# Altium PCB tr-804-DECT_2023-07.PcbDoc (part 2 of 3)
Units mm, origin at the board's own origin, x right, y up, seen from the top; angles counter-clockwise.
Board outline 65 x 137.8 mm, 4 copper layers (Top Layer, Top, Internal Plane 1, PWR, Internal Plane 2, GND, Bottom Layer, Bottom); 160 components, 162 nets, 856 pads, 321 vias.
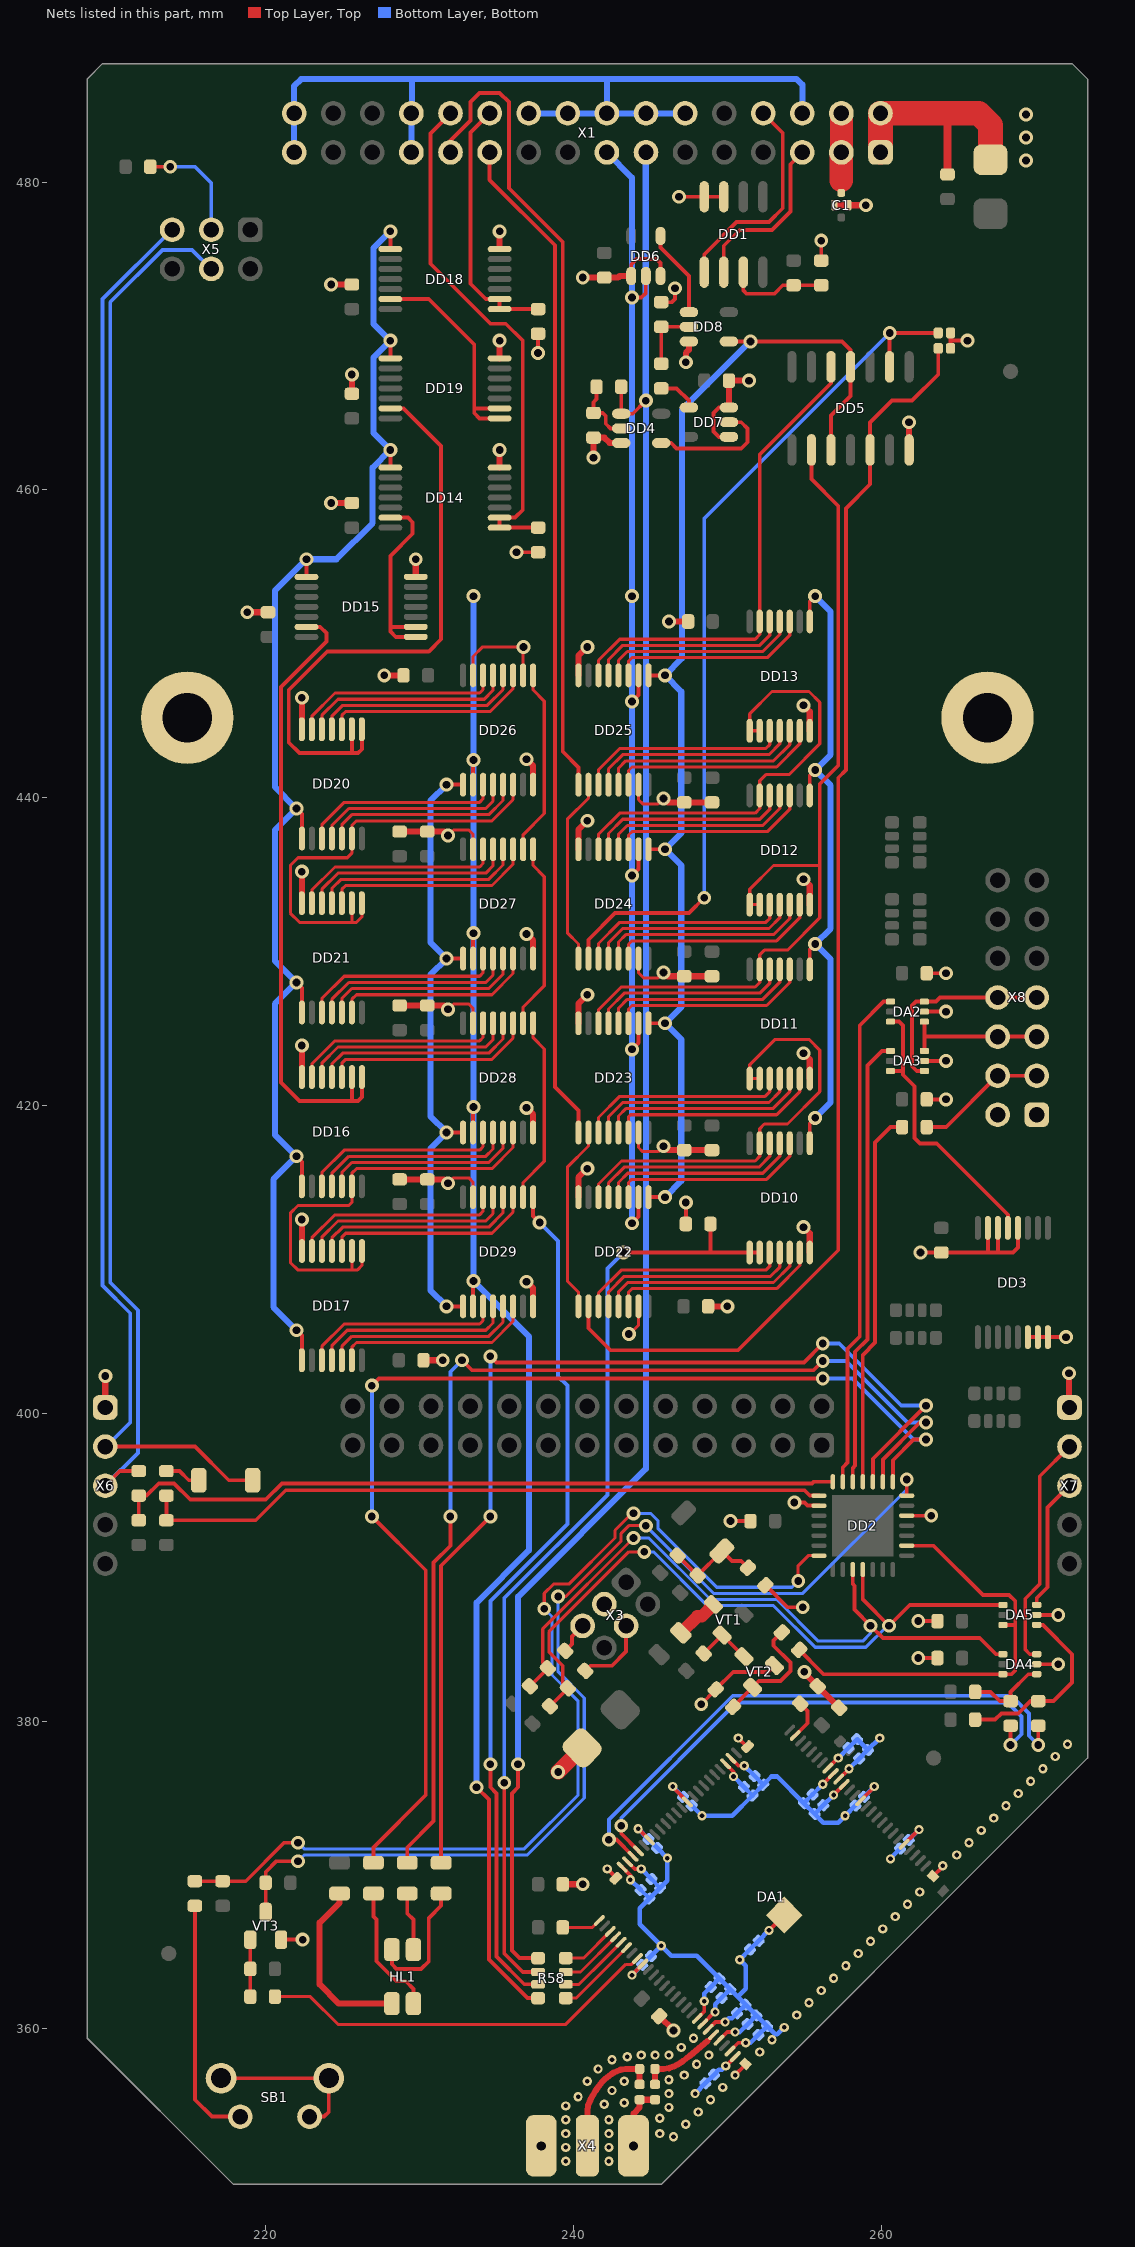
[diagram p4: the nets of this part, all layers, seen from the top]

## Via types
v1: diameter 0.9, hole 0.5, Top Layer, Top to Bottom Layer, Bottom, 229 vias
v2: diameter 0.6, hole 0.3, Top Layer, Top to Bottom Layer, Bottom, 92 vias

## Nets (pads, with @x,y where several pads share a name; then routed paths per layer and width w, separated by ;. In a path a pad name is that pad's centre, name@x,y a point inside that pad or via, vN(x,y) a via of type N, cw(c..) or ccw(c..) an arc to the next point about the centre after c; other vN are vias at no path point) (continued)
GND: C1.2 C1.4 C4.2 C5.2 C7.2 C10.2 C11.2 C12.2 C13.2 C14.2 C15.2 C16.2 C17.2 C18.2 C19.2 C20.2 C21.2 C22.2 C23.2 C24.2 C25.2 C26.2 C27.2 C28.2 C29.2 C30.2 C31.2 C32.2 C33.2 C34.2 C35.2 C36.2 C37.2 C38.2 C39.2 C40.2 C52.2 C53.2 C56.2 DA1.1 DA1.6 DA1.14 DA1.17 DA1.18 DA1.19 DA1.20 DA1.28 DA1.30 DA1.31 DA1.38 DA1.45 DA1.49 DA1.50 DA1.51 DA1.60 DA1.70 DA1.71 DA1.72 DA1.74 DA1.76 DA1.77 DA1.78 DA1.80 DA2.2 DA3.2 DA4.2 DA5.2 DD1.3 DD1.4 DD2.5 DD2.16 DD3.6 DD3.7 DD3.8 DD3.12 DD3.14 DD3.15 DD4.3 DD5.7 DD6.1 DD6.3 DD7.1 DD7.3 DD8.3 DD10.7 DD11.7 DD12.7 DD13.7 DD14.7 DD15.7 DD16.7 DD17.7 DD18.7 DD19.7 DD20.7 DD21.7 DD22.8 DD22.15 DD23.8 DD23.15 DD24.8 DD24.15 DD25.8 DD25.15 DD26.8 DD26.10 DD26.15 DD27.8 DD27.15 DD28.8 DD28.15 DD29.8 DD29.15 L3.2 L4.2 M1.1 M2.1 R11.1 R14.1 R15.1 R18.2 R21.2 R59.2 R60.2 SA4.1 SA4.2 SA5.1 SA5.2 SA6.1 SA6.2 SA7.1 SA7.2 SA8.1 SA8.2 SA9.1 SA9.2 SA10.1 SA10.2 SA11.1 SA11.2 SA12.1 SA12.2 SA13.1 SA13.2 SA14.1 SA14.2 SA15.1 SA15.2 SA16.1 SA16.2 SA17.1 SA17.2 SA18.1 SA18.2 SA20.1 SA20.2 SA21.1 SA21.2 SA22.1 SA22.2 SA23.1 SA23.2 SA24.1 SA24.2 SA25.2 SA26.2 SB1.1 SB1.3 SB1.4 VT2.3 VT3.3 X1.1 X1.2 X1.6 X1.12 X1.14 X1.16 X1.18 X1.20 X1.25 X1.26 X1.31 X1.32 X3.3 X4.2 X4.3 X5.3 X6.1 X7.1 X8.1 X8.2 | length 375
  Top Layer, Top w0.2: v1(231.85,414.95) 232.2,415.3 233.2,415.3 233.475,415.025 DD29.15@233.475,414.05 ; v1(231.85,426.25) 232.2,426.6 233.2,426.6 233.475,426.325 DD28.15@233.475,425.35 ; v1(231.85,437.55) 232.2,437.9 233.2,437.9 233.475,437.625 DD27.15@233.475,436.65 ; DD26.15@233.475,447.95 233.475,449.175 234.1,449.8 v1@236.725,449.8 ; DD26.10@236.725,447.95 v1@236.725,449.8 ; v1@236.725,449.825 v1@236.725,449.8 ; v1(236.75,449.8) v1@236.725,449.8 ; v1(243.6,405.15) 243.65,405.15 244.225,405.725 DD22.15@244.225,406.95 ; DD23.15@244.225,418.25 244.225,417.275 244.5,417 245.5,417 v1(245.85,417.35) ; DD24.15@244.225,429.55 244.225,428.625 244.55,428.3 245.5,428.3 v1(245.85,428.65) ; DD25.15@244.225,440.85 244.225,439.875 244.5,439.6 245.5,439.6 v1(245.85,439.95)
  Top Layer, Top w0.25: R59.2@212.5,481 v1(213.8,481) ; SB1.4@217.1,356.8 SB1.3@224.1,356.8 224.1,354.6 223.8,354.3 SB1.1@222.85,354.3 ; VT3.3@221,365.8 v1(222.4,365.8) ; v1(236.3,455.95) R11.1@237.7,455.95 ; v1(237.7,468.9) R15.1@237.7,470.15 ; v2(242.2,370.4) 242.754,369.846 DA1.51@242.754,369.79 ; DA1.50@243.164,370.511 243.7,369.975 v2(243.7,369.7) ; DA1.49@243.518,370.865 243.982,370.4 v2(244.4,370.4) ; DD6.1@243.75,473.9 243.75,474.65 244.1,475 245.4,475 245.65,474.75 DD6.3@245.65,473.9 ; v2(243.8,363.5) 243.8,363.51 DA1.60@244.508,364.218 ; v2(244.2,373) 244.311,372.9 DA1.45@244.932,372.279 ; C11.2@245.65,472.25 C11.2@245.7,472.2 246.4,472.2 246.6,472.4 v1(246.6,473.1) ; v2(246.45,375.75) 246.45,375.711 DA1.38@247.407,374.754 ; v1(246.85,479.05) DD1.4@248.495,479.05 DD1.3@249.765,479.05 ; R14.1@247.3,412.3 v1(247.3,413.7) ; DA1.70@248.043,360.682 248.5,361.139 v2(248.5,361.8) ; v1(248.3,381.1) 249.238,382.038 R18.2@249.238,382.062 250.377,383.2 252.64,383.2 VT2.3@253.057,383.617 ; DA1.71@248.397,360.329 249.168,361.1 v2(249.2,361.1) ; DA1.72@248.75,359.975 249.225,360.45 v2(249.85,360.45) ; DA1.74@249.457,359.268 249.989,359.8 v2(250.5,359.8) ; DA1.31@249.882,377.229 250.4,376.71 v2(250.4,376.4) ; v2(249.9,357.6) 249.91,357.6 DA1.77@250.518,358.208 ; DD7.1@250.1,463.45 249.45,463.45 249.1,463.8 249.1,465 249.45,465.35 DD7.3@250.1,465.35 ; DA1.76@250.164,358.561 250.703,359.1 v2(251.2,359.1) ; v1(250.2,393) C14.2@251.5,393 ; DA1.30@250.235,377.582 250.718,377.1 v2(251.1,377.1) ; v2(250.5,357) 251.176,357.676 DA1.78@251.176,357.734 ; v2(250.7,378.9) 251.254,378.346 DA1.28@251.31,378.346 ; C56.2@252.466,388.834 253.9,387.4 v1(254.9,387.4) ; v2(252.7,366.4) DA1.80@253.7,367.4 ; v1(254.35,394.2) 255,394.2 255.2,394 DD2.16@255.95,394 ; R21.2@256.1,474.9 v1(256.1,476.2) ; v2(256.2,375.9) 256.3,376.01 DA1.19@256.882,376.592 ; DA1.20@256.528,376.946 257.083,377.5 v2(257.2,377.6) ; v2(256.9,375.2) 257.004,375.3 DA1.17@257.589,375.885 ; DA1.18@257.236,376.239 257.797,376.8 v2(257.9,376.9) ; DA1.14@258.65,374.825 259.3,375.475 v2(259.55,375.75) ; DA1.6@261.478,371.996 262.182,372.7 v2(262.45,372.95) ; DD2.5@261.65,393.35 v1(263.25,393.35) ; v1(262.4,384.1) C18.2@263.65,384.1 ; v1(262.4,386.5) C19.2@263.65,386.5 ; v1(262.55,410.45) C12.2@263.9,410.45 266.9,410.45 ; DA3.2@262.8,422.9 v1(264.2,422.9) ; DA2.2@262.8,426.1 v1(264.2,426.1) ; C17.2@262.95,420.4 v1(264.2,420.4) ; C16.2@262.95,428.6 v1(264.2,428.6) ; DA1.1@263.366,369.924 264,370.558 v2(264,370.6) ; SA25.2@264.5,469.2 264.5,469.7 ; SA26.2@264.5,470.2 264.5,469.7 ; v1(265.6,469.7) 264.5,469.7 ; DD3.15@266.925,412.05 266.925,410.475 266.9,410.45 ; DD3.14@267.575,412.05 267.575,410.475 267.55,410.45 ; DD3.12@268.875,412.05 268.875,410.775 268.55,410.45 267.55,410.45 ; DD3.6@269.525,404.95 DD3.7@270.175,404.95 DD3.8@270.825,404.95 v1(272,404.95) ; DA4.2@270.1,383.7 v1(271.5,383.7) ; DA5.2@270.1,386.9 v1(271.5,386.9) ; 266.9,410.45 267.55,410.45
  Top Layer, Top w0.4: X6.1@209.57,400.38 209.57,402.42 v1(209.58,402.43) ; v1(218.8,452.05) C29.2@220.15,452.05 ; DD17.7@222.349,410.55 v1(222.35,412.6) v1(222.35,412.6) ; DD16.7@222.349,421.85 222.349,423.899 v1(222.35,423.9) ; DD21.7@222.349,433.15 222.349,435.249 v1(222.35,435.2) ; DD20.7@222.349,444.45 222.349,446.649 v1(222.35,446.5) ; v1(224.25,459.15) C30.2@225.6,459.15 ; v1(224.25,473.35) C35.2@225.6,473.35 ; C34.2@225.6,466.25 v1(225.6,467.5) ; v1(227.7,447.95) C40.2@228.95,447.95 ; C31.2@228.7,415.2 C37.2@230.5,415.2 231.6,415.2 v1(231.85,414.95) ; C33.2@228.7,426.5 C38.2@230.5,426.5 231.6,426.5 v1(231.85,426.25) ; C36.2@228.7,437.8 C39.2@230.5,437.8 231.6,437.8 v1(231.85,437.55) ; DD15.7@229.75,454.351 v1(229.75,455.5) ; C32.2@230.25,403.45 v1(231.5,403.45) ; DD14.7@235.2,461.451 v1(235.2,462.6) ; DD19.7@235.2,468.551 v1(235.2,469.7) ; DD18.7@235.2,475.651 v1(235.2,476.8) ; v1@236.725,449.825 v1(236.75,449.8) ; v1(236.95,408.55) 237.375,408.125 DD29.8@237.375,406.95 ; v1(236.95,419.85) 237.375,419.425 DD28.8@237.375,418.25 ; v1(236.95,431.15) 237.375,430.725 DD27.8@237.375,429.55 ; v1(236.95,442.5) 237.375,442.075 DD26.8@237.375,440.85 ; R60.2@239.3,369.4 v1(240.6,369.4) ; DD22.8@240.325,414.05 240.325,415.325 v1(240.9,415.9) ; DD23.8@240.325,425.35 240.325,426.625 v1(240.9,427.2) ; DD24.8@240.325,436.65 240.325,437.925 v1(240.9,438.5) ; DD25.8@240.325,447.95 240.325,449.225 v1(240.9,449.8) ; v1(240.6,473.8) C20.2@242,473.8 242.9,473.8 243,473.9 DD6.1@243.75,473.9 ; v1(241.3,462.1) C10.2@241.3,463.4 242,463.4 242.35,463.05 DD4.3@243.1,463.05 ; X4.2@243.9,352.4 243.9,354.5 244.3,354.9 L4.2@244.3,355.4 L3.2@245.3,355.4 ; C7.2@245.566,360.834 v1(246.5,359.9) ; v1(245.85,417.35) 246.1,417.1 C27.2@247.2,417.1 C22.2@249,417.1 ; v1(245.85,428.65) 246.1,428.4 C26.2@247.2,428.4 C21.2@249,428.4 ; v1(245.85,439.95) 246.1,439.7 C25.2@247.2,439.7 C23.2@249,439.7 ; v1(246.2,451.45) C24.2@247.45,451.45 ; v1(247.3,468.3) 247.3,468.9 247.5,469.1 DD8.3@247.5,469.65 ; C28.2@248.75,406.95 v1(250,406.95) ; DD7.3@250.1,465.35 C15.2@250.1,467.1 v1(251.4,467.1) ; v1(254.95,412.1) 255.351,411.699 DD10.7@255.351,410.45 ; v1(254.95,423.4) 255.351,422.999 DD11.7@255.351,421.75 ; v1(254.95,434.7) 255.351,434.299 DD12.7@255.351,433.05 ; v1(254.95,446) 255.351,445.599 DD13.7@255.351,444.35 ; v1(255,383.2) 255,383.131 C5.2@255.866,382.266 C4.2@257.266,380.866 ; C1.4@256.95,478.5 C1.2@257.85,478.5 v1(259,478.5) ; v1(261.8,464.4) 261.811,464.389 DD5.7@261.811,462.6 ; v1(272.2,402.6) 272.2,400.409 X7.1@272.229,400.38
  Top Layer, Top w0.5: C13.2@264.3,480.5 264.3,484.47
  Top Layer, Top w1: v1(239,376.7) C52.2@240.563,378.263
  Top Layer, Top w1.6: X1.1@259.95,481.93 X1.2@259.95,484.47 264.3,484.47 266.33,484.47 267.1,483.7 C53.2@267.1,481.45
  Bottom Layer, Bottom w0.25: v1(213.8,481) 215.4,481 216.46,479.94 X5.3@216.46,476.9 ; SA21.2@244.367,369.033 SA21.1@244.933,368.467 ; SA23.2@245.067,369.733 SA23.1@245.633,369.167 ; v2(260.6,371.05) v2@260.6,371.1
  Bottom Layer, Bottom w0.3: v2(243.7,369.7) SA21.2@244.367,369.033 ; v2(243.8,363.5) SA14.2@244.467,364.167 SA14.1@245.033,364.733 v2(245.7,365.4) ; v2(244.2,373) SA24.2@244.867,372.333 SA24.1@245.433,371.767 v2(246.1,371.1) 246.1,369.634 SA23.1@245.633,369.167 SA21.1@244.933,368.467 244.3,367.834 244.3,366.8 v2(245.7,365.4) ; v2(244.4,370.4) SA23.2@245.067,369.733 ; v2(246.45,375.75) SA4.2@247.117,375.083 SA4.1@247.683,374.517 v2(248.35,373.85) 250.316,373.85 SA22.1@251.633,375.167 ; v2(247.9,355.8) SA6.1@248.567,356.467 SA6.2@249.133,357.033 249.45,357.35 249.65,357.35 v2(249.9,357.6) ; v2(248.5,361.8) 248.5,362.3 SA13.2@248.917,362.717 SA13.1@249.483,363.283 ; v2(249.2,361.1) 249.2,361.6 SA11.2@249.617,362.017 SA11.1@250.183,362.583 ; v2(249.85,360.45) 250.1,360.7 250.3,360.7 SA10.2@250.617,361.017 SA10.1@251.183,361.583 ; v2(250.4,376.4) SA22.2@251.067,375.733 SA22.1@251.633,375.167 ; v2(250.5,359.8) 250.8,359.8 SA9.2@251.317,360.317 SA9.1@251.883,360.883 ; v2(251.1,377.1) SA20.2@251.767,376.433 SA20.1@252.333,375.867 ; v2(251.2,359.1) 251.5,359.1 SA7.2@252.017,359.617 SA7.1@252.583,360.183 ; v2(252.7,366.4) SA5.2@252.033,365.733 SA5.1@251.467,365.167 v2(250.8,364.5) 251.2,364.1 251.2,362.6 250.683,362.083 ; v2(253.7,360.1) 253.25,359.65 253.1,359.65 253.1,359.666 SA7.1@252.583,360.183 ; v2(256.2,375.9) SA17.2@255.533,375.233 SA17.1@254.967,374.667 ; v2(256.9,375.2) SA15.2@256.233,374.533 SA15.1@255.667,373.967 ; v2(257.2,377.6) SA18.2@257.867,378.267 SA18.1@258.433,378.833 SA16.1@259.133,378.133 ; v2(257.9,376.9) SA16.2@258.567,377.567 SA16.1@259.133,378.133 ; v2(259.55,375.75) SA12.2@258.883,375.083 SA12.1@258.317,374.517 v2(257.65,373.85) 257.2,373.4 256.234,373.4 SA15.1@255.667,373.967 ; v2(259.9,378.9) SA16.1@259.133,378.133 ; v2@260.6,371.1 SA8.1@261.217,371.717 SA8.2@261.783,372.283 v2(262.45,372.95) ; v2(245.7,365.4) 246.35,364.75 248.016,364.75 SA13.1@249.483,363.283 ; SA13.1@249.483,363.283 SA11.1@250.183,362.583 ; SA11.1@250.183,362.583 250.683,362.083 ; 250.683,362.083 SA10.1@251.183,361.583 ; SA10.1@251.183,361.583 SA9.1@251.883,360.883 ; SA22.1@251.633,375.167 SA20.1@252.333,375.867 ; SA9.1@251.883,360.883 SA7.1@252.583,360.183 ; SA20.1@252.333,375.867 252.866,376.4 253.234,376.4 SA17.1@254.967,374.667 ; SA17.1@254.967,374.667 SA15.1@255.667,373.967
  Bottom Layer, Bottom w0.4: v1@209.57,402.42 v1(209.58,402.43) ; X1.31@221.85,481.93 X1.32@221.85,484.47 221.85,486.25 222.3,486.7 229.5,486.7 ; X1.25@229.47,481.93 X1.26@229.47,484.47 229.47,484.53 229.2,484.8 229.5,485.1 229.5,486.7 ; X1.20@237.09,484.47 X1.18@239.63,484.47 X1.16@242.17,484.47 ; X1.12@247.25,484.47 X1.14@244.71,484.47 X1.16@242.17,484.47 ; X1.6@254.87,484.47 254.87,486.33 254.5,486.7 242.2,486.7 ; 229.5,486.7 242.2,486.7 ; X1.16@242.17,484.47 242.17,486.67 242.2,486.7
  other v1: 269.4,481.4 269.4,482.9 269.4,484.4
  other v2: 239.5,351.4 242.3,351.4 239.5,352.3 242.3,352.3 246.5,353 239.5,353.2 242.3,353.2 245.6,353.2 247.3,353.8 239.5,354.1 242.3,354.1 245.6,354.2 248.1,354.6 246.2,354.9 239.5,355 242,355.1 243.3,355.2 248.9,355.4 240.3,355.6 246.2,355.8 242.5,356 249.7,356.2 240.9,356.6 243.3,356.6 246.2,356.7 247.2,357 241.6,357.4 248,357.7 242.5,358 243.5,358.2 244.4,358.3 245.3,358.3 246.2,358.3 248.8,358.3 252.1,358.5 247,358.8 252.9,359.3 247.8,359.4 254.5,360.9 255.3,361.7 256.1,362.5 256.9,363.3 257.7,364.1 258.5,364.9 259.3,365.7 260.1,366.5 260.9,367.3 261.7,368.1 262.5,368.9 264.9,371.3 265.7,372.1 266.5,372.9 267.3,373.7 268.1,374.5 268.9,375.3 269.7,376.1 270.5,376.9 271.3,377.7 272.1,378.5
KEY: DD2.21 R12.1 R30.2 | length 65.6
  Top Layer, Top w0.2: v1(238.1,387.3) 238.1,388.3 238.7,388.9 239.7,388.9 242.7,391.9 242.7,392.4 243.8,393.5 v1(243.9,393.5) ; v1(254.6,389.1) 254.6,390.1 255.25,390.75 DD2.21@255.95,390.75
  Top Layer, Top w0.25: R30.2@215.4,369.6 R12.1@217.2,369.6 218.7,369.6 221.2,372.1 v1(222.1,372.1)
  Bottom Layer, Bottom w0.2: v1(222.1,372.1) 222.5,371.7 236.8,371.7 240.3,375.2 240.3,381.3 238.6,383 238.6,386.8 v1(238.1,387.3) ; v1(243.9,393.5) 245,393.5 245.5,393 245.5,392.5 249.3,388.7 254.2,388.7 v1(254.6,389.1)
LED_BLUE: DD2.10 R8.1 | length 71.3
  Top Layer, Top w0.25: R8.1@231.4,370.8 231.4,390.1 v1(234.6,393.3) ; v1(234.6,403.7) 235,403.3 254.969,403.3 v1(256.2,404.531) ; DD2.10@259.45,395.55 259.45,397.05 v1(262.9,400.5)
  Bottom Layer, Bottom w0.25: v1(234.6,393.3) v1(234.6,403.7) ; v1(256.2,404.531) 257.269,404.531 261.3,400.5 v1(262.9,400.5)
LED_GREEN: DD2.9 R55.1 | length 71.7
  Top Layer, Top w0.25: R55.1@229.2,370.8 229.2,371.8 230.9,373.5 230.9,390.3 232,391.4 v1(232,393.3) ; v1(232.75,403.45) 233.4,402.8 255.6,402.8 v1(256.2,403.4) ; DD2.9@260.1,395.55 260.1,397 262.5,399.4 v1(262.9,399.4)
  Bottom Layer, Bottom w0.25: v1(232,393.3) 232,402.7 v1(232.75,403.45) ; v1(256.2,403.4) 257.7,403.4 261.7,399.4 v1(262.9,399.4)
LED_RED: DD2.8 R7.2 | length 75.8
  Top Layer, Top w0.25: v1(226.9,393.3) 230.4,389.8 230.4,375.2 227,371.8 R7.2@227,370.8 ; v1(226.9,401.8) 227.369,402.269 v1(256.2,402.269) ; DD2.8@260.75,395.55 260.75,396.95 262.1,398.3 v1(262.9,398.3)
  Bottom Layer, Bottom w0.25: v1(226.9,393.3) v1(226.9,401.8) ; v1(256.2,402.269) 258.131,402.269 262.1,398.3 v1(262.9,398.3)
LED_STATE: DD2.7 R13.1 VT3.2 | length 70.3
  Top Layer, Top w0.2: v1(239,388.1) 239.5,388.1 243.1,391.7 243.1,392.2 243.6,392.7 v1(244.7,392.7)
  Top Layer, Top w0.25: VT3.2@220,367.6 R13.1@220,369.5 220,370.2 220.7,370.9 v1(222.1,370.9) ; DD2.7@261.65,394.65 v1(261.65,395.7)
  Bottom Layer, Bottom w0.2: v1(222.1,370.9) 222.5,371.3 237,371.3 240.7,375 240.7,381.5 239,383.2 v1(239,388.1) ; v1(244.7,392.7) 249.1,388.3 254.9,388.3 261.65,395.05 v1(261.65,395.7)
LOAD_REG: DD5.3 DD5.11 DD8.4 DD22.1 DD23.1 DD24.1 DD25.1 DD26.1 DD27.1 DD28.1 DD29.1 | length 120.8
  Top Layer, Top w0.25: v1(231.75,406.95) DD29.1@232.825,406.95 ; v1(231.75,418.25) DD28.1@232.825,418.25 ; v1(231.75,429.55) DD27.1@232.825,429.55 ; v1(231.75,440.85) DD26.1@232.825,440.85 ; DD22.1@244.875,414.05 v1(245.95,414.05) ; DD23.1@244.875,425.35 v1(245.95,425.35) ; DD24.1@244.875,436.65 v1(245.95,436.65) ; DD25.1@244.875,447.95 v1(245.95,447.95) ; DD8.4@250.1,469.65 v1(251.5,469.65) 257.45,469.65 258.001,469.099 DD5.11@258.001,468 258.001,466.101 256.731,464.831 DD5.3@256.731,462.6
  Bottom Layer, Bottom w0.4: v1(231.75,406.95) 230.7,408 230.7,417.2 v1(231.75,418.25) 230.7,419.3 230.7,428.5 v1(231.75,429.55) 230.7,430.6 230.7,439.8 v1(231.75,440.85) ; v1(245.95,414.05) 247,415.1 247,424.3 v1(245.95,425.35) 247,426.4 247,435.6 v1(245.95,436.65) 247,437.7 247,446.9 v1(245.95,447.95) 247.05,449.05 247.05,465.2 v1(251.5,469.65)
LRCK_I2S: DD4.1 R57.2 R58.8 X1.13 | length 126.1
  Top Layer, Top w0.25: v1(236.4,377.2) 236.4,375.7 236,375.3 236,365.1 236.5,364.6 R58.8@237.7,364.6 ; R57.2@243.1,466.7 DD4.1@243.1,464.95 243.85,464.95 v1(244.7,465.8)
  Bottom Layer, Bottom w0.4: v1(236.4,377.2) 236.4,388.09 244.71,396.4 244.71,465.79 v1(244.7,465.8) 244.7,481.92 X1.13@244.71,481.93
MASTER/~SLAVE: DA2.6 DA3.6 DD3.13 | length 18.3
  Top Layer, Top w0.25: DA3.6@260.6,422.25 261.4,422.25 ; DA2.6@260.6,425.45 261.15,425.45 261.4,425.2 261.4,422.25 ; DD3.13@268.225,412.05 268.225,412.9 263.6,417.525 262.525,417.525 262.15,417.9 262.15,421.25 261.4,422 261.4,422.25
NET00000: C1.1 X1.3 X1.4 | length 5.2
  Top Layer, Top w0.4: C1.1@257.4,479.3 257.4,480.1
  Top Layer, Top w1: X1.3@257.4,481.92 X1.3@257.41,481.93
  Top Layer, Top w1.5: 257.4,480.1 X1.3@257.4,481.92 ; X1.3@257.41,481.93 X1.4@257.41,484.47
NET00002: DD1.7 R21.1 R54.1 | length 6.6
  Top Layer, Top w0.25: DD1.7@251.035,474.15 251.035,472.965 251.25,472.75 253.05,472.75 253.6,473.3 R54.1@254.3,473.3 R21.1@256.1,473.3
NET00003: C3.2 L4.1 X4.1 | length 8.1
  Top Layer, Top w0.4: X4.1@240.9,352.4 240.9,354.65 240.95,355.05 241.1,355.4 241.3,355.75 241.45,356 241.65,356.3 241.85,356.55 242.05,356.75 242.3,356.95 242.6,357.15 243.05,357.35 243.4,357.4 C3.2@244.3,357.4 L4.1@244.3,356.4
NET00004: C3.1 DA1.73 L3.1 | length 5.6
  Top Layer, Top w0.25: 248.702,359.22 DA1.73@249.104,359.622
  Top Layer, Top w0.4: L3.1@245.3,356.4 C3.1@245.3,357.4 245.85,357.4 246.2,357.45 246.5,357.55 246.8,357.7 247.1,357.9 247.55,358.25 248.702,359.22
NET00006: R18.1 R28.2 VT2.1 | length 7.9
  Top Layer, Top w0.25: R18.1@250.37,380.93 VT2.1@251.643,382.203 252.04,382.6 253.45,382.6 254.1,383.25 254.1,383.8 253,384.9 253,385.231 R28.2@253.534,385.766
NET00007: R19.1 R29.2 VT3.1 | length 3.7
  Top Layer, Top w0.25: R29.2@219,362.1 R19.1@219,363.9 VT3.1@219,365.8
NET00008: L1.1 VT1.2 | length 2.9
  Top Layer, Top w0.8: L1.1@246.976,385.738 248.047,386.81 248.33,386.81 VT1.2@249.097,387.577 ; VT1.2@249.097,387.577 249.077,387.577 VT1.2@249.097,387.577
NET00012: R30.1 SB1.2 | length 16
  Top Layer, Top w0.25: R30.1@215.4,368 215.4,355.4 216.5,354.3 SB1.2@218.35,354.3
NET00013: DD7.4 R31.1 | length 2.6
  Top Layer, Top w0.25: R31.1@245.7,466.6 246.7,466.6 247.5,465.8 DD7.4@247.5,465.35
NET00014: DA1.48 R47.1 | length 38
  Top Layer, Top w0.25: v1(242.3,372.3) 242.79,372.3 DA1.48@243.871,371.218 ; v1(270.2,378.45) R47.1@270.2,379.7
  Bottom Layer, Bottom w0.25: v1(242.3,372.3) 242.3,373.6 250.35,381.65 268.45,381.65 269.6,380.5 269.6,379.05 v1(270.2,378.45)
NET00015: DA1.47 R46.1 | length 35.5
  Top Layer, Top w0.25: v1(243.1,373.2) 243.1,372.697 DA1.47@244.225,371.572 ; v1(268.4,378.45) R46.1@268.4,379.7
  Bottom Layer, Bottom w0.25: v1(243.1,373.2) 243.1,373.7 250.6,381.2 268.2,381.2 269.1,380.3 269.1,379.15 v1(268.4,378.45)
NET00016: C11.1 DD8.2 R31.2 | length 4.2
  Top Layer, Top w0.25: R31.2@245.7,468.2 C11.1@245.7,470.6 DD8.2@247.5,470.6
NET00018: C10.1 DD4.2 R57.1 | length 4.3
  Top Layer, Top w0.25: R57.1@241.5,466.7 241.5,465.9 241.3,465.7 C10.1@241.3,465 241.9,465 242.1,464.8 242.1,464.3 242.4,464 DD4.2@243.1,464
NET00020: C56.1 R20.2 R45.2 VD1.A | length 6.3
  Top Layer, Top w0.25: R45.2@246.766,390.766 R20.2@248.066,389.466 ; R20.2@248.066,389.5 R20.2@248.066,389.466 ; C56.1@251.334,389.966 250.9,390.4 250.3,390.4 VD1.A@249.637,391.063 249.637,391.037 R20.2@248.066,389.466
NET00021: R44.1 VD2.A | length 2.3
  Top Layer, Top w0.25: R44.1@213.55,396.25 214.4,396.25 215,395.65 VD2.A@215.65,395.65
NET00022: DD5.5 DD22.10 SA25.1 | length 83
  Top Layer, Top w0.25: DD22.10@240.975,406.95 240.975,405.525 242.4,404.1 250.7,404.1 257.2,410.6 257.2,441.3 257.7,441.8 257.7,458.8 259.271,460.371 DD5.5@259.271,462.6 259.271,464.371 260.7,465.8 262,465.8 263.7,467.5 SA25.1@263.7,469.2
NET00026: DD5.9 DD24.10 SA26.1 | length 56.9
  Top Layer, Top w0.25: DD24.10@240.975,429.55 240.975,430.775 242.7,432.5 247.5,432.5 v1(248.5,433.5) ; DD5.9@260.541,468 260.541,470.191 v1(260.55,470.2) SA26.1@263.7,470.2
  Bottom Layer, Bottom w0.25: v1(248.5,433.5) 248.5,458.15 v1(260.55,470.2)
NET00037: C5.1 DA1.26 | length 2.6
  Top Layer, Top w0.25: DA1.26@254.407,379.067 255.2,379.86 255.2,380.669 C5.1@254.734,381.134
NET00040: HL1.b R8.2 | length 8.4
  Top Layer, Top w0.25: HL1.b@228.2,365.15 228.2,364.2 228.5,363.9 230.1,363.9 230.6,364.4 230.6,367.2 231.4,368 R8.2@231.4,368.8
NET00041: HL1.An R56.1 | length 11.7
  Top Layer, Top w0.4: R56.1@224.8,368.8 224.8,368.2 223.5,366.9 223.5,362.9 224.75,361.65 HL1.An@228.2,361.65
NET00042: HL1.g R55.2 | length 3.8
  Top Layer, Top w0.25: R55.2@229.2,368.8 229.2,367.5 229.6,367.1 HL1.g@229.6,365.15
NET00043: HL1.r R7.1 | length 8.6
  Top Layer, Top w0.25: R7.1@227,368.8 227,367.3 227.2,367.1 227.2,364.4 228.5,363.1 229.1,363.1 229.6,362.6 HL1.r@229.6,361.65
NET00045: DA1.52 R16.1 | length 2.6
  Top Layer, Top w0.2: R16.1@239.3,366.6 241.233,366.6 DA1.52@241.679,367.046
NET00048: R17.2 VT1.1 VT2.2 | length 3.7
  Top Layer, Top w0.25: R17.2@248.461,384.395 VT1.1@249.663,385.597 VT2.2@251.077,384.183
NET00064: DD6.4 DD8.1 | length 5.7
  Top Layer, Top w0.25: DD6.4@245.65,476.5 245.65,475.75 247.5,473.9 DD8.1@247.5,471.55
NET00073: DD10.13 DD11.1 DD11.2 DD22.6 | length 28.5
  Top Layer, Top w0.2: DD22.6@241.625,414.05 241.625,414.9 243.125,416.4 251.8,416.4 252.101,416.701 DD10.13@252.101,417.55 252.101,418.501 252.4,418.8 253.9,418.8 256,420.9 256,423.6 255.3,424.3 253.1,424.3 251.451,422.651 DD11.1@251.451,421.75 DD11.2@252.101,421.75
NET00075: DA1.55 R58.5 | length 4.2
  Top Layer, Top w0.2: R58.5@239.5,363.7 240.454,363.7 DA1.55@242.74,365.986
NET00076: DA1.54 R58.7 | length 3.6
  Top Layer, Top w0.2: R58.7@239.5,364.6 240.647,364.6 DA1.54@242.386,366.339
NET00077: DA1.56 R58.3 | length 4.7
  Top Layer, Top w0.2: R58.3@239.5,362.9 240.361,362.9 242.061,364.6 DA1.56@243.093,365.632
NET00078: DA1.57 R58.1 | length 5.3
  Top Layer, Top w0.2: R58.1@239.5,362 240.168,362 DA1.57@243.447,365.279
NET00079: DD5.2 DD11.13 DD12.1 DD12.2 DD23.6 | length 57.2
  Top Layer, Top w0.2: DD23.6@241.625,425.35 241.625,426.225 243.1,427.7 251.801,427.7 252.101,428 DD11.13@252.101,428.85 252.101,429.801 252.4,430.1 253.9,430.1 256,432.2 256,435.6 ; DD12.2@252.101,433.05 DD12.1@251.451,433.05 251.451,434.051 253,435.6 256,435.6 ; 256,435.9 256,435.6
  Top Layer, Top w0.25: DD5.2@255.461,462.6 255.461,460.7 257.2,458.961 257.2,442.1 256,440.9 256,435.9
NET00081: DD10.3 DD22.11 | length 13.6
  Top Layer, Top w0.2: DD22.11@241.625,406.95 241.625,407.825 243.1,409.3 252.5,409.3 252.751,409.551 DD10.3@252.751,410.45
NET00082: DD10.4 DD22.12 | length 13.7
  Top Layer, Top w0.2: DD22.12@242.275,406.95 242.275,407.875 243.3,408.9 252.8,408.9 253.401,409.501 DD10.4@253.401,410.45
NET00083: DD10.5 DD22.13 | length 13.7
  Top Layer, Top w0.2: DD22.13@242.925,406.95 242.925,407.9 243.525,408.5 253,408.5 254.051,409.551 DD10.5@254.051,410.45
NET00084: DD10.6 DD22.14 | length 13.6
  Top Layer, Top w0.2: DD22.14@243.575,406.95 243.575,407.875 243.8,408.1 253.2,408.1 254.701,409.601 DD10.6@254.701,410.45
NET00085: DD10.10 DD22.3 | length 13
  Top Layer, Top w0.2: DD22.3@243.575,414.05 243.575,415 243.775,415.2 252.551,415.2 254.051,416.7 DD10.10@254.051,417.55
NET00086: DD10.11 DD22.4 | length 13
  Top Layer, Top w0.2: DD22.4@242.925,414.05 242.925,415 243.525,415.6 252.301,415.6 253.401,416.7 DD10.11@253.401,417.55
NET00087: DD10.12 DD22.5 | length 13
  Top Layer, Top w0.2: DD22.5@242.275,414.05 242.275,414.975 243.3,416 252.051,416 252.751,416.7 DD10.12@252.751,417.55
NET00088: DD11.3 DD23.11 | length 13.6
  Top Layer, Top w0.2: DD23.11@241.625,418.25 241.625,419.225 243,420.6 252.451,420.6 252.751,420.9 DD11.3@252.751,421.75
NET00089: DD11.4 DD23.12 | length 13.7
  Top Layer, Top w0.2: DD23.12@242.275,418.25 242.275,419.275 243.2,420.2 252.701,420.2 253.401,420.9 DD11.4@253.401,421.75
NET00090: DD11.5 DD23.13 | length 13.7
  Top Layer, Top w0.2: DD23.13@242.925,418.25 242.925,419.325 243.4,419.8 252.951,419.8 254.051,420.9 DD11.5@254.051,421.75
NET00091: DD11.6 DD23.14 | length 13.7
  Top Layer, Top w0.2: DD23.14@243.575,418.25 243.575,419.275 243.7,419.4 253.2,419.4 254.701,420.901 DD11.6@254.701,421.75
NET00092: DD11.10 DD23.3 | length 13
  Top Layer, Top w0.2: DD23.3@243.575,425.35 243.575,426.275 243.8,426.5 252.551,426.5 254.051,428 DD11.10@254.051,428.85
NET00093: DD11.11 DD23.4 | length 13
  Top Layer, Top w0.2: DD23.4@242.925,425.35 242.925,426.325 243.5,426.9 252.3,426.9 253.401,428.001 DD11.11@253.401,428.85
NET00094: DD11.12 DD23.5 | length 13
  Top Layer, Top w0.2: DD23.5@242.275,425.35 242.275,426.275 243.3,427.3 252.1,427.3 252.751,427.951 DD11.12@252.751,428.85
NET00097: DD22.9 DD23.10 | length 12.2
  Top Layer, Top w0.2: DD22.9@240.325,406.95 240.325,407.875 239.6,408.6 239.6,416 240.975,417.375 DD23.10@240.975,418.25
NET00098: DD5.12 DD13.13 DD25.6 | length 31.5
  Top Layer, Top w0.2: DD25.6@241.625,447.95 241.625,448.925 243,450.3 251.8,450.3 252.101,450.601 DD13.13@252.101,451.45
  Top Layer, Top w0.25: DD13.13@252.101,451.45 252.101,462.301 256.731,466.931 DD5.12@256.731,468
NET00099: DD12.13 DD13.1 DD13.2 DD24.6 | length 28.7
  Top Layer, Top w0.2: DD24.6@241.625,436.65 241.625,437.625 243,439 251.8,439 252.101,439.301 DD12.13@252.101,440.15 252.101,441.101 252.5,441.5 254,441.5 256,443.5 256,446.2 255.3,446.9 252.9,446.9 251.451,445.451 DD13.1@251.451,444.35 DD13.2@252.101,444.35
NET00100: DD12.3 DD24.11 | length 13.7
  Top Layer, Top w0.2: DD24.11@241.625,429.55 241.625,430.525 243,431.9 252.5,431.9 252.751,432.151 DD12.3@252.751,433.05
NET00101: DD12.4 DD24.12 | length 13.7
  Top Layer, Top w0.2: DD24.12@242.275,429.55 242.275,430.575 243.2,431.5 252.7,431.5 253.401,432.201 DD12.4@253.401,433.05
NET00102: DD12.5 DD24.13 | length 13.7
  Top Layer, Top w0.2: DD24.13@242.925,429.55 242.925,430.625 243.4,431.1 253,431.1 254.051,432.151 DD12.5@254.051,433.05
NET00103: DD12.6 DD24.14 | length 13.6
  Top Layer, Top w0.2: DD24.14@243.575,429.55 243.575,430.475 243.8,430.7 253.2,430.7 254.701,432.201 DD12.6@254.701,433.05
NET00104: DD12.10 DD24.3 | length 13
  Top Layer, Top w0.2: DD24.3@243.575,436.65 243.575,437.575 243.8,437.8 252.6,437.8 254.051,439.251 DD12.10@254.051,440.15
NET00105: DD12.11 DD24.4 | length 13
  Top Layer, Top w0.2: DD24.4@242.925,436.65 242.925,437.625 243.5,438.2 252.3,438.2 253.401,439.301 DD12.11@253.401,440.15
NET00106: DD12.12 DD24.5 | length 13.1
  Top Layer, Top w0.2: DD24.5@242.275,436.65 242.275,437.675 243.2,438.6 252.1,438.6 252.751,439.251 DD12.12@252.751,440.15
NET00107: DD13.3 DD25.11 | length 13.7
  Top Layer, Top w0.2: DD25.11@241.625,440.85 241.625,441.825 243,443.2 252.5,443.2 252.751,443.451 DD13.3@252.751,444.35
NET00108: DD13.4 DD25.12 | length 13.7
  Top Layer, Top w0.2: DD25.12@242.275,440.85 242.275,441.875 243.2,442.8 252.7,442.8 253.401,443.501 DD13.4@253.401,444.35
NET00109: DD13.5 DD25.13 | length 13.7
  Top Layer, Top w0.2: DD25.13@242.925,440.85 242.925,441.925 243.4,442.4 253,442.4 254.051,443.451 DD13.5@254.051,444.35
NET00110: DD13.6 DD25.14 | length 13.6
  Top Layer, Top w0.2: DD25.14@243.575,440.85 243.575,441.775 243.8,442 253.2,442 254.701,443.501 DD13.6@254.701,444.35
NET00111: DD13.10 DD25.3 | length 13
  Top Layer, Top w0.2: DD25.3@243.575,447.95 243.575,448.875 243.8,449.1 252.6,449.1 254.051,450.551 DD13.10@254.051,451.45
NET00112: DD13.11 DD25.4 | length 13
  Top Layer, Top w0.2: DD25.4@242.925,447.95 242.925,448.925 243.5,449.5 252.3,449.5 253.401,450.601 DD13.11@253.401,451.45
NET00113: DD13.12 DD25.5 | length 13.1
  Top Layer, Top w0.2: DD25.5@242.275,447.95 242.275,448.975 243.2,449.9 252.1,449.9 252.751,450.551 DD13.12@252.751,451.45
NET00114: DD24.9 DD25.10 | length 12.2
  Top Layer, Top w0.2: DD24.9@240.325,429.55 240.325,430.5 239.6,431.225 239.6,438.6 240.975,439.975 DD25.10@240.975,440.85
NET00115: DD15.13 DD16.1 DD16.2 | length 40.6
  Top Layer, Top w0.25: DD15.13@222.65,451.101 223.549,451.101 223.95,450.7 223.95,450.15 221,447.2 221,421.5 222.2,420.3 225.6,420.3 ; DD16.2@225.599,421.85 225.599,420.301 225.6,420.3 ; DD16.1@226.249,421.85 226.249,420.549 226,420.3 225.6,420.3
NET00116: DD14.13 DD15.1 DD15.2 | length 12.7
  Top Layer, Top w0.25: DD14.13@228.1,458.201 229.25,458.2 229.55,457.9 229.55,457.15 228.1,455.7 228.1,451.1 ; DD15.1@229.75,450.451 228.449,450.451 228.1,450.8 228.1,451.1 ; DD15.2@229.75,451.101 228.101,451.101 228.1,451.1
NET00117: DD16.13 DD17.1 DD17.2 DD28.6 | length 28.7
  Top Layer, Top w0.2: DD17.2@225.599,410.55 225.599,409.326 225.6,409.326 ; DD17.1@226.249,410.55 226.249,409.6 225.975,409.326 225.6,409.326 ; DD28.6@236.075,418.25 236.075,417.275 234.7,415.9 225.9,415.9 225.599,415.599 DD16.13@225.599,414.75 225.599,413.699 225.4,413.5 222.1,413.5 221.6,413 221.6,409.8 222.075,409.326 225.6,409.326
NET00118: DD19.13 DD20.1 DD20.2 | length 39.5
  Top Layer, Top w0.25: DD20.2@225.599,444.45 225.599,442.901 225.6,442.9 ; DD20.1@226.249,444.45 226.249,443.149 226,442.9 225.6,442.9 ; DD19.13@228.1,465.301 228.95,465.301 229.35,464.901 231.4,462.851 231.4,450.3 230.6,449.5 224,449.5 221.5,447 221.5,443.6 222.2,442.9 225.6,442.9
NET00119: DD18.13 DD19.1 DD19.2 | length 14.6
  Top Layer, Top w0.25: DD18.13@228.1,472.401 230.599,472.401 233.55,469.45 233.55,465.3 ; DD19.1@235.2,464.651 233.899,464.651 233.55,465 233.55,465.3 ; DD19.2@235.2,465.301 233.551,465.301 233.55,465.3
NET00120: DD20.13 DD21.1 DD21.2 DD26.6 | length 28.6
  Top Layer, Top w0.2: DD21.2@225.599,433.15 225.599,431.901 225.6,431.9 ; DD21.1@226.249,433.15 226.249,432.249 225.9,431.9 225.6,431.9 ; DD26.6@236.075,440.85 236.075,439.875 234.7,438.5 225.9,438.5 225.599,438.199 DD20.13@225.599,437.35 225.599,436.399 225.3,436.1 222.1,436.1 221.6,435.6 221.6,432.5 222.2,431.9 225.6,431.9
NET00121: DD26.9 DD27.10 | length 12.2
  Top Layer, Top w0.2: DD27.10@236.725,436.65 236.725,437.6 238.1,438.975 238.1,446.275 237.375,447 DD26.9@237.375,447.95
NET00122: DD28.9 DD29.10 | length 12.2
  Top Layer, Top w0.2: DD29.10@236.725,414.05 236.725,415 238.1,416.375 238.1,423.675 237.375,424.4 DD28.9@237.375,425.35
NET00125: DD20.3 DD26.11 | length 13.6
  Top Layer, Top w0.2: DD20.3@224.949,444.45 224.949,445.349 225.2,445.6 234.6,445.6 236.075,447.075 DD26.11@236.075,447.95
NET00126: DD20.4 DD26.12 | length 13.6
  Top Layer, Top w0.2: DD20.4@224.299,444.45 224.299,445.299 225,446 234.4,446 235.425,447.025 DD26.12@235.425,447.95
NET00127: DD20.5 DD26.13 | length 13.7
  Top Layer, Top w0.2: DD20.5@223.649,444.45 223.649,445.349 224.7,446.4 234.2,446.4 234.775,446.975 DD26.13@234.775,447.95
NET00128: DD20.6 DD26.14 | length 13.6
  Top Layer, Top w0.2: DD20.6@222.999,444.45 222.999,445.299 224.5,446.8 233.9,446.8 234.125,447.025 DD26.14@234.125,447.95
NET00129: DD20.10 DD26.3 | length 13
  Top Layer, Top w0.2: DD20.10@223.649,437.35 223.649,438.249 225.1,439.7 233.9,439.7 234.125,439.925 DD26.3@234.125,440.85
NET00130: DD20.11 DD26.4 | length 13.1
  Top Layer, Top w0.2: DD20.11@224.299,437.35 224.299,438.199 225.4,439.3 234.3,439.3 234.775,439.775 DD26.4@234.775,440.85
NET00131: DD20.12 DD26.5 | length 13.1
  Top Layer, Top w0.2: DD20.12@224.949,437.35 224.949,438.249 225.6,438.9 234.5,438.9 235.425,439.825 DD26.5@235.425,440.85
NET00132: DD27.9 DD28.10 | length 12.2
  Top Layer, Top w0.2: DD28.10@236.725,425.35 236.725,426.4 238.1,427.775 238.1,434.875 237.375,435.6 DD27.9@237.375,436.65
NET00173: DD21.3 DD27.11 | length 13.7
  Top Layer, Top w0.2: DD21.3@224.949,433.15 224.949,434.049 225.2,434.3 234.7,434.3 236.075,435.675 DD27.11@236.075,436.65
NET00174: DD21.4 DD27.12 | length 13.7
  Top Layer, Top w0.2: DD21.4@224.299,433.15 224.299,434.099 224.9,434.7 234.5,434.7 235.425,435.625 DD27.12@235.425,436.65
NET00175: DD21.5 DD27.13 | length 13.7
  Top Layer, Top w0.2: DD21.5@223.649,433.15 223.649,434.049 224.7,435.1 234.3,435.1 234.775,435.575 DD27.13@234.775,436.65
NET00176: DD21.6 DD27.14 | length 13.6
  Top Layer, Top w0.2: DD21.6@222.999,433.15 222.999,433.999 224.5,435.5 233.9,435.5 234.125,435.725 DD27.14@234.125,436.65
NET00177: DD21.10 DD27.3 | length 13
  Top Layer, Top w0.2: DD21.10@223.649,426.05 223.649,426.949 225.1,428.4 233.9,428.4 234.125,428.625 DD27.3@234.125,429.55
NET00178: DD21.11 DD27.4 | length 13.1
  Top Layer, Top w0.2: DD21.11@224.299,426.05 224.299,426.899 225.4,428 234.3,428 234.775,428.475 DD27.4@234.775,429.55
NET00179: DD21.12 DD27.5 | length 13.1
  Top Layer, Top w0.2: DD21.12@224.949,426.05 224.949,426.949 225.6,427.6 234.5,427.6 235.425,428.525 DD27.5@235.425,429.55
NET00180: DD21.13 DD27.6 | length 13
  Top Layer, Top w0.2: DD21.13@225.599,426.05 225.599,426.899 225.9,427.2 234.7,427.2 236.075,428.575 DD27.6@236.075,429.55
NET00181: DD16.3 DD28.11 | length 13.7
  Top Layer, Top w0.2: DD16.3@224.949,421.85 224.949,422.749 225.2,423 234.7,423 236.075,424.375 DD28.11@236.075,425.35
NET00182: DD16.4 DD28.12 | length 13.7
  Top Layer, Top w0.2: DD16.4@224.299,421.85 224.299,422.699 225,423.4 234.5,423.4 235.425,424.325 DD28.12@235.425,425.35
NET00183: DD16.5 DD28.13 | length 13.7
  Top Layer, Top w0.2: DD16.5@223.649,421.85 223.649,422.749 224.7,423.8 234.3,423.8 234.775,424.275 DD28.13@234.775,425.35
NET00184: DD16.6 DD28.14 | length 13.6
  Top Layer, Top w0.2: DD16.6@222.999,421.85 222.999,422.699 224.5,424.2 233.9,424.2 234.125,424.425 DD28.14@234.125,425.35
NET00185: DD16.10 DD28.3 | length 13
  Top Layer, Top w0.2: DD16.10@223.649,414.75 223.649,415.649 225.1,417.1 233.9,417.1 234.125,417.325 DD28.3@234.125,418.25
NET00186: DD16.11 DD28.4 | length 13.1
  Top Layer, Top w0.2: DD16.11@224.299,414.75 224.299,415.599 225.4,416.7 234.3,416.7 234.775,417.175 DD28.4@234.775,418.25
NET00187: DD16.12 DD28.5 | length 13.1
  Top Layer, Top w0.2: DD16.12@224.949,414.75 224.949,415.649 225.6,416.3 234.5,416.3 235.425,417.225 DD28.5@235.425,418.25
NET00188: DD17.3 DD29.11 | length 13.7
  Top Layer, Top w0.2: DD17.3@224.949,410.55 224.949,411.449 225.2,411.7 234.7,411.7 236.075,413.075 DD29.11@236.075,414.05
NET00189: DD17.4 DD29.12 | length 13.7
  Top Layer, Top w0.2: DD17.4@224.299,410.55 224.299,411.399 225,412.1 234.5,412.1 235.425,413.025 DD29.12@235.425,414.05
NET00190: DD17.5 DD29.13 | length 13.7
  Top Layer, Top w0.2: DD17.5@223.649,410.55 223.649,411.449 224.7,412.5 234.3,412.5 234.775,412.975 DD29.13@234.775,414.05
NET00191: DD17.6 DD29.14 | length 13.6
  Top Layer, Top w0.2: DD17.6@222.999,410.55 222.999,411.399 224.5,412.9 233.9,412.9 234.125,413.125 DD29.14@234.125,414.05
NET00192: DD17.10 DD29.3 | length 13
  Top Layer, Top w0.2: DD17.10@223.649,403.45 223.649,404.349 225.1,405.8 233.9,405.8 234.125,406.025 DD29.3@234.125,406.95
NET00193: DD17.11 DD29.4 | length 13.1
  Top Layer, Top w0.2: DD17.11@224.299,403.45 224.299,404.399 225.3,405.4 234.3,405.4 234.775,405.875 DD29.4@234.775,406.95
NET00194: DD17.12 DD29.5 | length 13.1
  Top Layer, Top w0.2: DD17.12@224.949,403.45 224.949,404.349 225.6,405 234.5,405 235.425,405.925 DD29.5@235.425,406.95
NET00195: DD17.13 DD29.6 | length 13
  Top Layer, Top w0.2: DD17.13@225.599,403.45 225.599,404.299 225.9,404.6 234.7,404.6 236.075,405.975 DD29.6@236.075,406.95
P2[0]: DA1.59 R29.1 | length 26.1
  Top Layer, Top w0.2: R29.1@220.6,362.1 222.9,362.1 224.7,360.3 239.5,360.3 243.4,364.2 243.782,364.2 DA1.59@244.154,364.572
PGC_PROG: R49.1 X3.5 | length 2.1
  Top Layer, Top w0.25: R49.1@239.466,384.566 239.9,385 239.9,385.497 X3.5@240.591,386.188
PGD_PROG: R42.1 X3.4 | length 4.8
  Top Layer, Top w0.25: R42.1@240.766,383.266 241.1,383.6 242.5,383.6 243.419,384.519 X3.4@243.419,386.188
PWR_DECT: DA4.6 DA5.6 DD2.2 R28.1 | length 29.1
  Top Layer, Top w0.25: R28.1@254.666,384.634 254.516,384.784 256.25,383.05 DA4.6@267.9,383.05 268.45,383.05 268.7,383.3 268.7,386.25 ; DD2.2@261.65,391.4 263.4,391.4 266.6,388.2 268.3,388.2 268.7,387.8 268.7,386.25 ; DA5.6@267.9,386.25 268.7,386.25
RST_CT2: DD4.4 DD7.2 | length 8.2
  Top Layer, Top w0.25: DD4.4@245.7,463.05 246.35,463.05 246.7,462.7 250.9,462.7 251.3,463.1 251.3,464 250.9,464.4 DD7.2@250.1,464.4
RX1_I2S: DD25.9 X1.23 | length 53
  Top Layer, Top w0.25: X1.23@232.01,481.93 232.01,482.71 233.3,484 233.3,485.2 233.9,485.8 235.2,485.8 235.8,485.2 235.8,479.6 239.3,476.1 239.3,443 240.325,441.975 DD25.9@240.325,440.85
RX2_I2S: DD23.9 X1.21 | length 66.1
  Top Layer, Top w0.25: X1.21@234.55,481.93 234.55,480.15 238.8,475.9 238.8,421.2 240.325,419.675 DD23.9@240.325,418.25
RX_IN: R48.1 X5.4 X6.3 | length 89.6
  Top Layer, Top w0.25: X6.3@209.57,395.3 210.52,396.25 R48.1@211.75,396.25
  Bottom Layer, Bottom w0.25: X6.3@209.57,395.3 211.7,397.43 211.7,406.7 209.9,408.5 209.9,472.2 213.3,475.6 215.22,475.6 X5.4@216.46,474.36
RX_OUT: DA4.3 X7.2 | length 15.3
  Top Layer, Top w0.25: DA4.3@270.1,384.35 269.65,384.35 269.35,384.65 269.35,387.95 270.3,388.9 270.3,395.911 X7.2@272.229,397.84
RX_PCM: DD29.9 R58.4 | length 56
  Top Layer, Top w0.25: v1(234.6,377.2) 234.6,375.7 235,375.3 235,364.7 236.8,362.9 R58.4@237.7,362.9 ; DD29.9@237.375,414.05 237.375,412.825 v1(237.8,412.4)
  Bottom Layer, Bottom w0.25: v1(234.6,377.2) 234.6,387.8 239.6,392.8 239.6,401.8 239,402.4 239,411.2 v1(237.8,412.4)
RXD1: DD2.15 R10.1 R44.2 | length 45
  Top Layer, Top w0.25: R44.2@213.55,394.65 R10.1@213.55,393.05 219.35,393.05 221.3,395 255,395 255.35,394.65 DD2.15@255.95,394.65
RXD2: DA5.4 DD2.25 R42.2 R52.1 | length 45.5
  Top Layer, Top w0.2: R42.2@239.634,382.134 239.3,382.469 239.3,383.6 238.4,384.5 238.4,385.8 243.6,391 v1(244.6,391)
  Top Layer, Top w0.25: R52.1@238.466,380.966 R42.2@239.634,382.134 ; DD2.25@258.8,389.85 258.8,387.9 v1(260.5,386.2) 261.85,387.55 DA5.4@267.9,387.55
  Bottom Layer, Bottom w0.2: v1(244.6,391) 245.2,391 248.7,387.5 253,387.5 255.7,384.8 259,384.8 260.4,386.2 v1(260.5,386.2)
RXD_DECT: DA4.1 R46.2 R51.1 | length 5.3
  Top Layer, Top w0.25: R51.1@266.1,381.9 267.1,381.9 267.7,381.3 R46.2@268.4,381.3 268.4,381.9 269.55,383.05 DA4.1@270.1,383.05
SCK: DD2.11 R43.1 | length 24.5
  Top Layer, Top w0.25: DD2.11@258.8,395.55 258.8,403.8 259.6,404.6 259.6,417.6 260.6,418.6 R43.1@261.35,418.6
SCK_SPI: R43.2 X8.3 X8.4 | length 8.5
  Top Layer, Top w0.25: R43.2@262.95,418.6 264.22,418.6 X8.4@267.56,421.94 X8.3@270.1,421.94
SCL: DD1.6 X1.5 | length 11.1
  Top Layer, Top w0.25: DD1.6@249.765,474.15 249.765,475.865 250.8,476.9 252.9,476.9 254.1,478.1 254.1,481.16 X1.5@254.87,481.93
SCLK_I2S: DD6.2 DD10.8 DD11.8 DD12.8 DD13.8 DD14.8 DD15.8 DD16.8 DD17.8 DD18.8 DD19.8 DD20.8 DD21.8 DD22.2 DD23.2 DD24.2 DD25.2 DD26.2 DD27.2 DD28.2 DD29.2 R58.2 X1.15 | length 320.7
  Top Layer, Top w0.25: v1(222,405.4) 222.349,405.051 DD17.8@222.349,403.45 ; v1(222,416.7) 222.349,416.351 DD16.8@222.349,414.75 ; v1(222,428) 222.349,427.651 DD21.8@222.349,426.05 ; v1(222,439.3) 222.349,438.951 DD20.8@222.349,437.35 ; DD15.8@222.65,454.351 v1(222.65,455.5) ; DD14.8@228.1,461.451 v1(228.1,462.6) ; DD19.8@228.1,468.551 v1(228.1,469.7) ; DD18.8@228.1,475.651 v1(228.1,476.8) ; DD29.2@233.475,406.95 233.475,408.575 v1(233.5,408.6) ; DD28.2@233.475,418.25 233.475,419.875 v1(233.5,419.9) ; DD27.2@233.475,429.55 233.475,431.175 v1(233.5,431.2) ; DD26.2@233.475,440.85 233.475,442.425 v1(233.5,442.45) ; v1(233.7,375.7) 234.5,374.9 234.5,364.5 237,362 R58.2@237.7,362 ; v1(243.8,412.35) 244.225,412.775 DD22.2@244.225,414.05 ; v1(243.8,423.65) 244.225,424.075 DD23.2@244.225,425.35 ; v1(243.8,434.95) 244.225,435.375 DD24.2@244.225,436.65 ; v1(243.8,446.25) 244.225,446.675 DD25.2@244.225,447.95 ; v1(243.8,472.5) 244.4,472.5 244.7,472.8 DD6.2@244.7,473.9 ; DD10.8@255.351,417.55 255.351,418.851 v1(255.7,419.2) ; DD11.8@255.351,428.85 255.351,430.151 v1(255.7,430.5) ; DD12.8@255.351,440.15 255.351,441.451 v1(255.7,441.8) ; DD13.8@255.351,451.45 255.351,452.751 v1(255.7,453.1)
  Bottom Layer, Bottom w0.4: v1(222,405.4) 220.5,406.9 220.5,415.2 v1(222,416.7) 220.6,418.1 220.6,426.6 v1(222,428) 220.6,429.4 220.6,437.9 v1(222,439.3) 220.6,440.7 220.6,453.45 v1(222.65,455.5) 224.6,455.5 226.95,457.85 226.95,461.45 v1(228.1,462.6) 227,463.7 227,468.6 v1(228.1,469.7) 227,470.8 227,475.7 v1(228.1,476.8) ; v1(233.5,453.1) v1(233.5,442.45) v1(233.5,431.2) v1(233.5,419.9) v1(233.5,408.6) 237.1,405 237.1,391.1 233.7,387.7 v1(233.7,375.7) ; X1.15@242.17,481.93 243.8,480.3 v1(243.8,472.5) v1(243.8,453.1) v1(243.8,446.25) v1(243.8,434.95) v1(243.8,423.65) v1(243.8,412.35) ; v1(255.7,419.2) 256.7,420.2 256.7,429.5 v1(255.7,430.5) 256.7,431.5 256.7,440.8 v1(255.7,441.8) 256.7,442.8 256.7,452.1 v1(255.7,453.1)
SDA: DD1.5 X1.8 | length 14.2
  Top Layer, Top w0.25: DD1.5@248.495,474.15 248.495,475.295 250.6,477.4 252.7,477.4 253.6,478.3 253.6,483.2 X1.8@252.33,484.47
SDI: DA3.4 DD2.12 | length 29.3
  Top Layer, Top w0.25: DD2.12@258.15,395.55 258.15,396.45 258.3,396.6 258.3,404 259.1,404.8 259.1,422.6 260.05,423.55 DA3.4@260.6,423.55
SDI_SPI: DA2.3 DA3.1 X8.7 X8.8 | length 13.2
  Top Layer, Top w0.25: DA3.1@262.8,422.25 262.3,422.25 262,422.55 262,426.5 262.25,426.75 DA2.3@262.8,426.75 263.55,426.75 263.82,427.02 X8.8@267.56,427.02 X8.7@270.1,427.02
SDO: DA2.4 DD2.13 | length 32.7
  Top Layer, Top w0.25: DD2.13@257.5,395.55 257.5,396.5 257.8,396.8 257.8,404.2 258.6,405 258.6,425.2 260.15,426.75 DA2.4@260.6,426.75
SDO_SPI: DA2.1 DA3.3 X8.5 X8.6 | length 9.2
  Top Layer, Top w0.25: DA3.3@262.8,423.55 262.8,424.5 ; DA2.1@262.8,425.45 262.8,424.5 ; X8.5@270.1,424.48 X8.6@267.56,424.48 262.82,424.48 262.8,424.5
TX1_I2S: DD14.1 DD14.2 R11.2 X1.24 | length 34.2
  Top Layer, Top w0.25: X1.24@232.01,484.47 230.7,483.16 230.7,474.7 234.6,470.8 235.6,470.8 236.7,469.7 236.7,458.7 236.201,458.201 DD14.2@235.2,458.201 DD14.1@235.2,457.551 R11.2@237.699,457.551 ; R11.2@237.699,457.551 R11.2@237.7,457.55
TX2_I2S: DD18.1 DD18.2 R15.2 X1.22 | length 17.1
  Top Layer, Top w0.25: X1.22@234.55,484.47 233.3,483.22 233.3,473.4 234.299,472.401 DD18.2@235.2,472.401 DD18.1@235.2,471.751 R15.2@237.699,471.751 ; R15.2@237.699,471.751 R15.2@237.7,471.75
TX_IN: VD2.K X5.5 X6.2 | length 92.9
  Top Layer, Top w0.25: X6.2@209.57,397.84 215.41,397.84 217.6,395.65 VD2.K@219.15,395.65
  Bottom Layer, Bottom w0.25: X6.2@209.57,397.84 209.64,397.84 211.2,399.4 211.2,406.5 209.4,408.3 209.4,472.4 213.9,476.9 X5.5@213.92,476.9
TX_OUT: DA5.3 X7.3 | length 8.6
  Top Layer, Top w0.25: DA5.3@270.1,387.55 270.1,388 270.8,388.7 270.8,393.871 X7.3@272.229,395.3
TX_PCM: DD10.1 DD10.2 R14.2 R58.6 | length 62.2
  Top Layer, Top w0.25: v1(235.5,376) 235.5,364.9 236.7,363.7 R58.6@237.7,363.7 ; v1(243.25,410.45) 248.9,410.45 ; R14.2@248.9,412.3 248.9,410.45 ; DD10.2@252.101,410.45 DD10.1@251.451,410.45 248.9,410.45
  Bottom Layer, Bottom w0.25: v1(235.5,376) 235.5,388 242.2,394.7 242.2,409.4 v1(243.25,410.45)
TXD1: DD2.14 R9.1 R48.2 | length 47.9
  Top Layer, Top w0.25: R9.1@211.75,393.05 R48.2@211.75,394.65 212.25,394.65 213.05,395.45 214.05,395.45 215.1,394.4 220,394.4 221.05,395.45 255.5,395.45 255.6,395.55 DD2.14@256.85,395.55
TXD2: DA4.4 DD2.24 R49.2 R53.1 | length 45.1
  Top Layer, Top w0.2: R49.2@238.334,383.434 238,383.769 238,386 v1(243.9,391.9)
  Top Layer, Top w0.25: R53.1@237.166,382.266 R49.2@238.334,383.434 ; DD2.24@258.15,389.85 258.15,388.9 258.25,388.8 258.25,387.25 v1(259.3,386.2) 260.1,385.4 266.4,385.4 267.45,384.35 DA4.4@267.9,384.35
  Bottom Layer, Bottom w0.2: v1(243.9,391.9) 244.9,391.9 248.9,387.9 253.2,387.9 255.9,385.2 258.8,385.2 259.3,385.7 v1(259.3,386.2)
TXD_DECT: DA5.1 R47.2 R50.1 | length 12.2
  Top Layer, Top w0.25: R50.1@266.1,380.1 267.4,380.1 267.8,380.5 268.9,380.5 269.7,381.3 R47.2@270.2,381.3 271.2,381.3 272.4,382.5 272.4,384.35 270.5,386.25 DA5.1@270.1,386.25
pads on no net: 1.1 2.1 3.1 DA1.2 DA1.3 DA1.4 DA1.5 DA1.7 DA1.8 DA1.9 DA1.10 DA1.11 DA1.12 DA1.13 DA1.15 DA1.16 DA1.21 DA1.22 DA1.23 DA1.24 DA1.27 DA1.29 DA1.32 DA1.33 DA1.34 DA1.35 DA1.36 DA1.37 DA1.39 DA1.40 DA1.41 DA1.42 DA1.43 DA1.44 DA1.46 DA1.53 DA1.58 DA1.61 DA1.62 DA1.65 DA1.66 DA1.67 DA1.68 DA1.69 DA1.75 DA1.79 DD2.29 DD5.6 DD5.8 DD14.3 DD14.4 DD14.5 DD14.6 DD14.10 DD14.11 DD14.12 DD15.3 DD15.4 DD15.5 DD15.6 DD15.10 DD15.11 DD15.12 DD18.3 DD18.4 DD18.5 DD18.6 DD18.10 DD18.11 DD18.12 DD19.3 DD19.4 DD19.5 DD19.6 DD19.10 DD19.11 DD19.12 DD22.7 DD23.7 DD24.7 DD25.7 DD26.7 DD27.7 DD28.7 DD29.7 R24.7 R24.8 R25.7 R25.8 R26.1 R26.2 R27.1 R27.2 X1.9 X1.11 X1.17 X1.19 X1.27 X1.28 X1.29 X1.30 X2.1 X2.2 X2.3 X2.4 X2.5 X2.6 X2.7 X2.8 X2.9 X2.10 X2.11 X2.12 X2.13 X2.14 X2.15 X2.16 X2.17 X2.18 X2.19 X2.20 X2.21 X2.22 X2.23 X2.24 X2.25 X2.26 X3.6 X5.2
copper on no net: | length 172.8
  Top Layer, Top w0.2: 226.1,354 235.7,354 ; 209.3,359.9 209.3,380 212,380 212,359.9 209.3,359.9 ; 226.1,351 235.7,351 235.7,357 226.1,357 226.1,351
  Bottom Layer, Bottom w0.2: 226.1,354 235.7,354 ; 209.3,359.9 209.3,380 212,380 212,359.9 209.3,359.9 ; 226.1,351 235.7,351 235.7,357 226.1,357 226.1,351

## Polygon pours and split planes (outlines as drawn)
GND on Bottom Layer, Bottom "Bottom Layer, Bottom-GND" (solid, remove dead copper, pour order 2): 218,350.2 245.6,350.2 245.6,351.6 273.1,379.1 273.1,486.6 272.3,487.4 209.5,487.4 208.7,486.6 208.7,359.5
GND on Top Layer, Top "Top Layer, Top-GND" (solid, remove dead copper, pour order 1): 262.1,480.5 270.6,480.5 270.6,485.3 262.1,485.3
+3.3V on Top Layer, Top "Top Layer, Top-+3.3V" (solid, remove dead copper, pour order 0): 258.6,474.1 270.6,474.1 270.6,478.9 262.1,478.9 262.1,477.6 257.1,477.6 257.1,475.6
GND on Internal Plane 2, GND (split plane): 272.89,486.489 272.89,378.89 245.7,351.7 245.7,350.622 245.489,350.41 218.111,350.41 208.91,359.611 208.91,486.489 209.611,487.19 272.189,487.19
+3.3V on Internal Plane 1, PWR (split plane): 272.89,486.489 272.89,378.89 245.7,351.7 245.7,350.622 245.489,350.41 218.111,350.41 208.91,359.611 208.91,486.489 209.611,487.19 272.189,487.19
SCLK_I2S on Internal Plane 1, PWR (split plane): 229.01,453.82 229.029,453.813 229.048,453.805 229.054,453.804 229.06,453.802 229.08,453.801 229.1,453.798 256.398,453.798 256.398,452.402 229.148,452.402 224.19,454.88 224.171,454.887 224.152,454.895 224.146,454.896 224.14,454.898 224.12,454.899 224.1,454.902 221.902,454.902 221.902,456.098 224.452,456.098
+3.3V_DECT on Internal Plane 1, PWR (split plane): 259.515,380.2 257.9,378.585 253.743,382.743 253.701,382.775 253.652,382.795 253.6,382.802 246.7,382.802 246.648,382.795 246.599,382.775 246.557,382.743 238.757,374.943 238.725,374.901 238.705,374.852 238.698,374.8 238.698,368.1 238.705,368.048 238.725,367.999 238.757,367.957 244.315,362.4 243,361.085 236.602,367.484 236.602,375.716 245.384,384.498 255.216,384.498
LOAD_REG on Internal Plane 1, PWR (split plane): 246.598,413.402 237.1,413.402 237.048,413.395 237.019,413.383 236.999,413.375 236.981,413.361 236.957,413.343 232.457,408.843 232.425,408.801 232.405,408.752 232.398,408.7 232.398,406.202 231.102,406.202 231.102,409.616 236.184,414.698 246.598,414.698

## Keep-outs
Keep-Out Layer, Board:
  lines w0.01: 208.4,359.4 217.9,349.9 245.7,349.9 273.4,377.6 273.4,486.7 272.4,487.7 209.4,487.7 208.4,486.7 208.4,359.4
  lines w0.127: 208.4,359.4 217.9,349.9 245.7,349.9 273.4,377.6 273.4,486.7 272.4,487.7 209.4,487.7 208.4,486.7 208.4,359.4

## Other copper
Top Layer, Top:
  pour cut-out: 273.4,379.4 245.7,351.7 245.7,349.9 273.4,377.6
  pour cut-out: 226,350.9 235.8,350.9 235.8,357.1 226,357.1
  text "tr-804-DECT_2023-07" at 211.7,360.8 h2.12 r90
  text "2lay" at 226.8,355 h1.41
  text "3lay" at 226.8,351.6 h1.41
Bottom Layer, Bottom:
  pour cut-out: 245.7,349.9 273.4,377.6 273.4,379.4 245.7,351.7
  pour cut-out: 249.45,364.25 247.35,362.15 251.45,358.05 253.55,360.15
  pour cut-out: 220.6,480.7 261.2,480.7 261.2,485.7 220.6,485.7
  pour cut-out: 224.4,396.7 257.4,396.7 257.4,401.7 224.4,401.7
  pour cut-out: 252.601,367.291 250.444,365.134 251.434,364.144 253.591,366.301
  pour cut-out: 243.259,372.951 245.416,370.794 246.406,371.784 244.249,373.941
  pour cut-out: 259.501,376.691 257.344,374.534 258.334,373.544 260.491,375.701
  pour cut-out: 258.4,379.75 256.35,377.7 258,376.05 260.05,378.1
  pour cut-out: 253.25,375.9 251.2,377.95 249.55,376.3 251.6,374.25
  pour cut-out: 246.55,369.2 244.5,371.25 242.85,369.6 244.9,367.55
  pour cut-out: 245.101,365.741 242.944,363.584 243.934,362.594 246.091,364.751
  pour cut-out: 271,389 273.5,389 273.5,401.6 271,401.6
  pour cut-out: 208.3,389 210.8,389 210.8,401.6 208.3,401.6
  pour cut-out: 262.451,373.941 260.294,371.784 261.284,370.794 263.441,372.951
  pour cut-out: 255.7,373.05 257.75,375.1 256.1,376.75 254.05,374.7
  pour cut-out: 249.751,358.641 247.594,356.484 248.584,355.494 250.741,357.651
  pour cut-out: 225.6,355.3 225.6,358.3 222.6,358.3 222.6,355.3
  pour cut-out: 218.6,355.3 218.6,358.3 215.6,358.3 215.6,355.3
  pour cut-out: 245.509,375.701 247.666,373.544 248.656,374.534 246.499,376.691
  pour cut-out: 224.35,355.8 221.35,355.8 221.35,352.8 224.35,352.8
  pour cut-out: 217.7,478.1 215.2,478.1 215.2,475.7 217.7,475.7
  text "tr-804-DECT_2023-07" at 211.7,379.1 h2.12 r90
  text "2lay" at 229,355 h1.41
  text "3lay" at 229,351.6 h1.41
Internal Plane 1, PWR (plane layer: these items are gaps in the copper):
  region: 273.4,377.6 273.4,379.4 245.7,351.7 245.7,349.9
  region: 229.7,351 235.7,351 235.7,354 229.7,354
  lines w0.4: 208.4,359.4 217.9,349.9 245.7,349.9 273.4,377.6 273.4,486.7 272.4,487.7 209.4,487.7 208.4,486.7 208.4,359.4 ; 221.7,454.7 221.7,456.3 224.5,456.3 229.1,454 256.6,454 256.6,452.2 229.1,452.2 224.1,454.7 221.7,454.7 ; 230.9,406 230.9,409.7 236.1,414.9 246.8,414.9 246.8,413.2 237.1,413.2 232.6,408.7 232.6,406 230.9,406 ; 236.4,367.4 243,360.8 244.6,362.4 238.9,368.1 238.9,374.8 246.7,382.6 253.6,382.6 257.9,378.3 259.8,380.2 255.3,384.7 245.3,384.7 236.4,375.8 236.4,367.4
  text "GND" at 230.1,354.2 h1.59
Internal Plane 2, GND (plane layer: these items are gaps in the copper):
  region: 273.4,377.6 273.4,379.4 245.7,351.7 245.7,349.9
  region: 235.7,354 235.7,357 229.7,357 229.7,354
  lines w0.4: 208.4,359.4 217.9,349.9 245.7,349.9 273.4,377.6 273.4,486.7 272.4,487.7 209.4,487.7 208.4,486.7 208.4,359.4
  text "PWR" at 235.3,351 h1.59